# Altium PCB Tray 2 Fiddle.PcbDoc
Units mm, origin at the board's own origin, x right, y up, seen from the top; angles counter-clockwise.
Board outline 192 x 192 mm, 2 copper layers (L1, L6); 9 components, 666 nets, 180 pads, 0 vias.
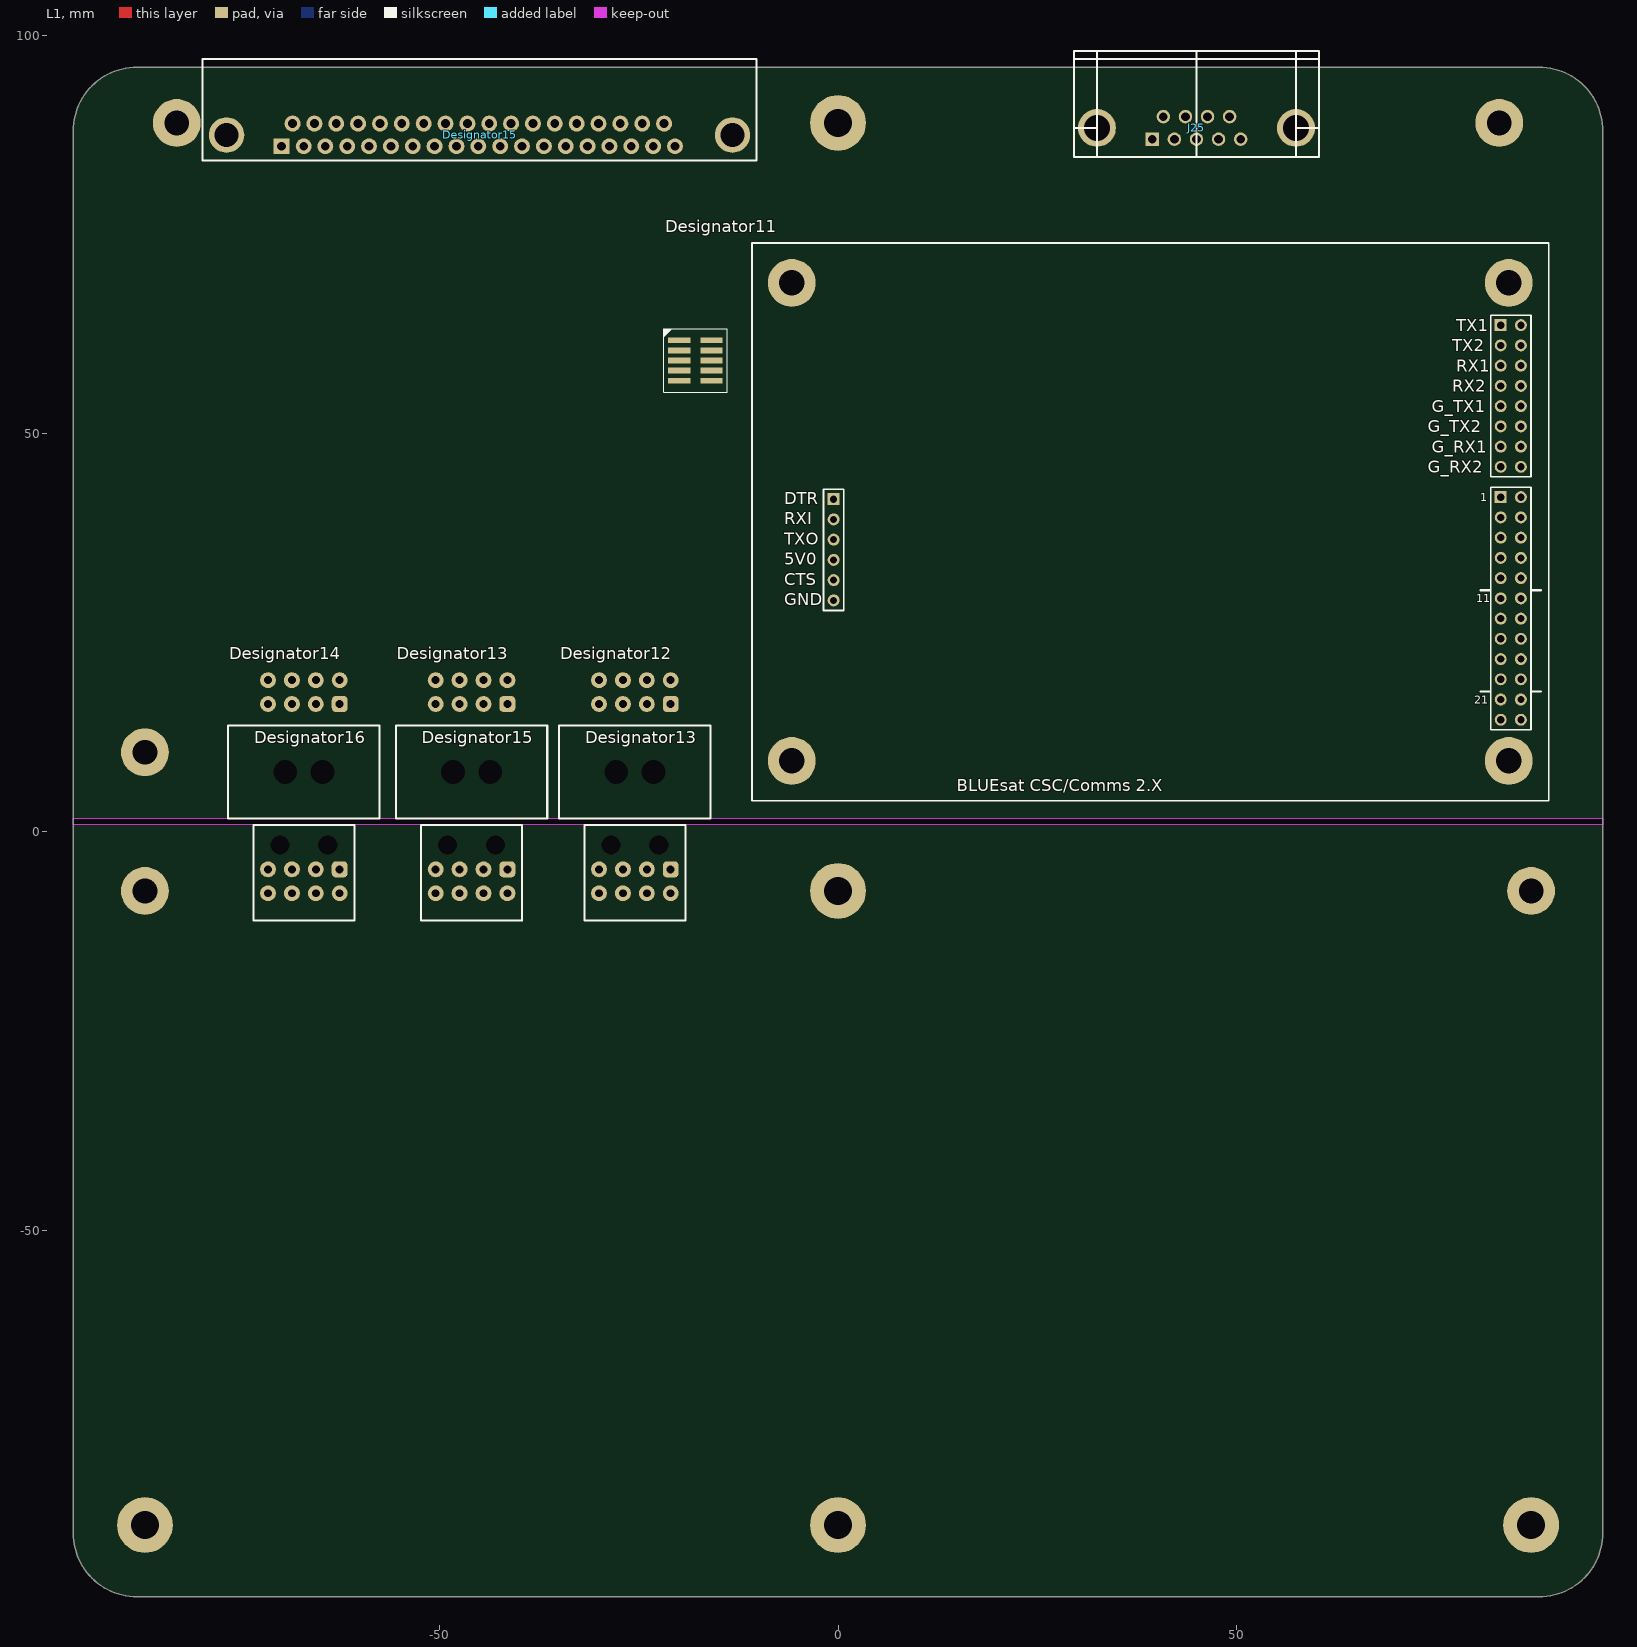
[diagram p0: L1 view]
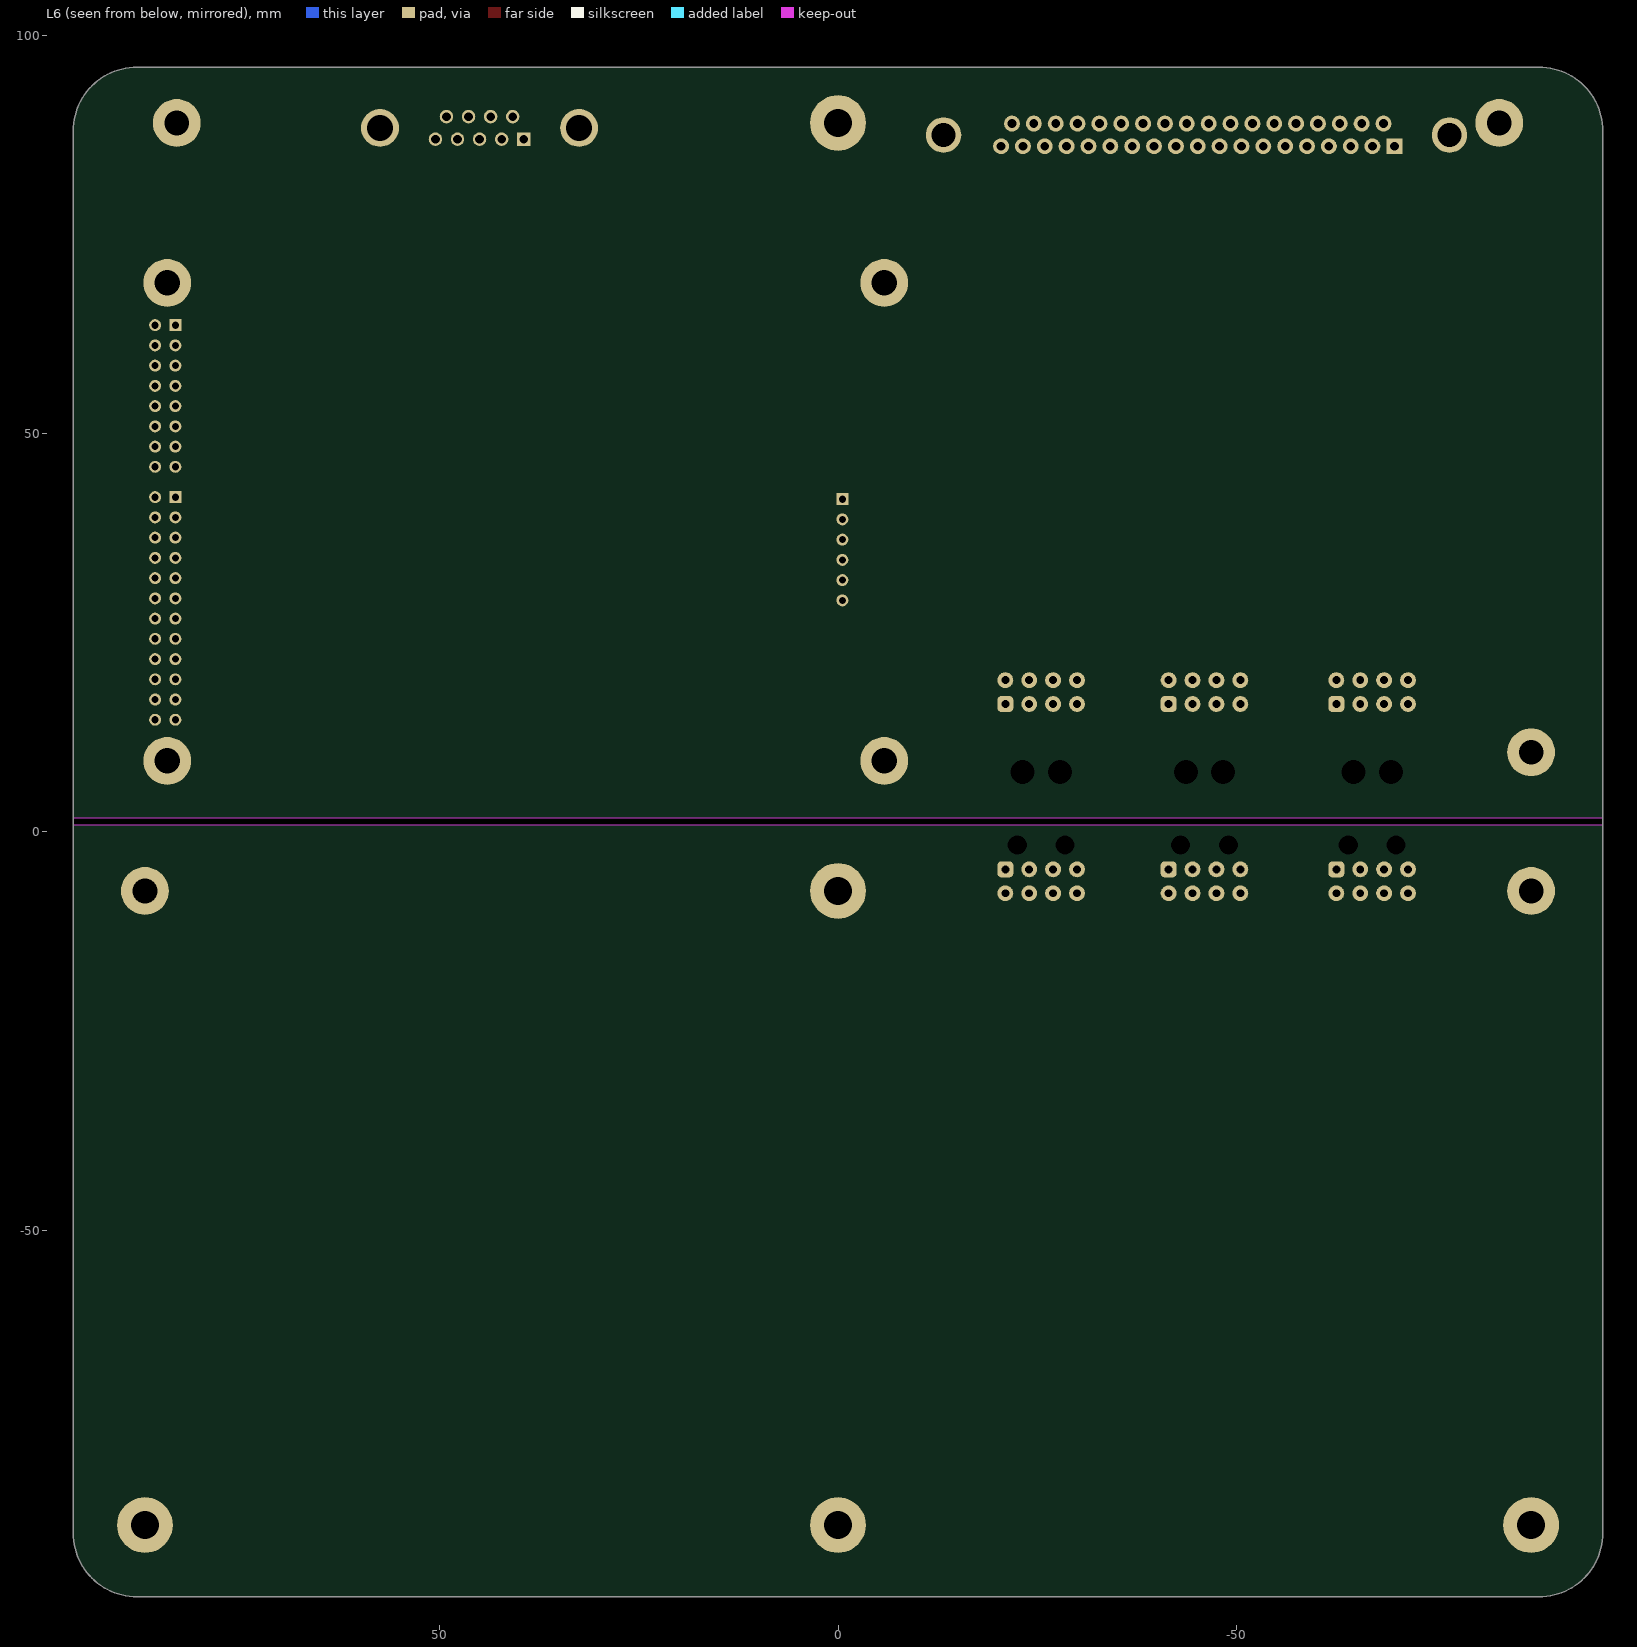
[diagram p1: L6 view, seen from below]

## Layer stack, top to bottom
L1: signal copper 0.0356
Dielectric: core 0.32, FR-4, Dk 4.8
L6: signal copper 0.0356

## Board outline
-96,-88 -96,88 cw(c-88,88) -88,96 88,96 cw(c88,88) 96,88 96,-88 cw(c88,-88) 88,-96 -88,-96 cw(c-88,-88)
cut-out: 96,1.7 96,0.9 -96,0.9 -96,1.7

## Design rules (kind name [scope] priority, off if disabled: settings)
Clearance [All] p1: gap=0.15
ComponentClearance [All] p1 off: gap=0.254 collisioncheckmode=3 verticalgap=0.254 showdistances=FALSE
FabricationTestPointUsage TestPointUsage [All] p1: valid=0 allowmultiple=FALSE
FabricationTestpoint Testpoint [All] p1: side=3 testpointundercomponent=TRUE minsize=1.016 maxsize=2.54 preferedsize=1.524 minholesize=0 maxholesize=1.016 preferedholesize=0.813 testpointgrid=0.025 allowsidetop=TRUE allowsidebottom=TRUE usegrid=TRUE gridtolerance=0
HoleSize [All] p1: absolutevalues=TRUE maxlimit=5 minlimit=0.025 maxpercent=80.000 minpercent=20.000
MinimumAnnularRing [All] p1: minimumring=0.15
PolygonConnect [All] p1: connectstyle=Relief reliefconductorwidth=0.254 reliefentries=4 polygonreliefangle="90 Angle" airgapwidth=0.254
RoutingVias [All] p1: holewidth=0.4 width=0.8 viastyle="Through Hole" minholewidth=0.4 minwidth=0.8 maxholewidth=4 maxwidth=5
SilkToSolderMaskClearance SilkscreenOverComponentPads [IsPad] p1: minsilkscreentomaskgap=0.254 clearancetoexposedcopper=TRUE
SolderMaskExpansion [All] p1: expansion=0.102
Width [All] p1: maxlimit=10 minlimit=0.15 preferedwidth=0.6 bottomlayer_prefwidth=0.2 minimp=50.000000 maximp=50.000000 favimp=50.000000
23 further rules are at their usual default settings.

## Classes and differential pairs
net class CODEC_I2C[0..1]: CODEC_I2C0 CODEC_I2C1
net class CODEC_I2S[0..3]: CODEC_I2S0 CODEC_I2S1 CODEC_I2S2 CODEC_I2S3
net class E\C\C\_\B\E\[0..3]: E\C\C\_\B\E\0 E\C\C\_\B\E\1 E\C\C\_\B\E\2 E\C\C\_\B\E\3
net class ECC_A[2..21]: ECC_A2 ECC_A3 ECC_A4 ECC_A5 ECC_A6 ECC_A7 ECC_A8 ECC_A9 ECC_A10 ECC_A11 ECC_A12 ECC_A13 ECC_A14 ECC_A15 ECC_A16 ECC_A17 ECC_A18 ECC_A19 ECC_A20 ECC_A21
net class ECC_D[0..31]: ECC_D0 ECC_D1 ECC_D2 ECC_D3 ECC_D4 ECC_D5 ECC_D6 ECC_D7 ECC_D8 ECC_D9 ECC_D10 ECC_D11 ECC_D12 ECC_D13 ECC_D14 ECC_D15 ECC_D16 ECC_D17 ECC_D18 ECC_D19 ECC_D20 ECC_D21 ECC_D22 ECC_D23 ECC_D24 ECC_D25 ECC_D26 ECC_D27 ECC_D28 ECC_D29 ECC_D30 ECC_D31
net class EXP[0..31]: EXP0 EXP1 EXP2 EXP3 EXP4 EXP5 EXP6 EXP7 EXP8 EXP9 EXP10 EXP11 EXP12 EXP13 EXP14 EXP15 EXP16 EXP17 EXP18 EXP19 EXP20 EXP21 EXP22 EXP23 EXP24 EXP25 EXP26 EXP27 EXP28 EXP29 EXP30 EXP31
net class F\L\A\S\H\_\C\S\[0..1]: F\L\A\S\H\_\C\S\0 F\L\A\S\H\_\C\S\1
net class F\P\G\A\_\C\S\[0..1]: F\P\G\A\_\C\S\0 F\P\G\A\_\C\S\1
net class GPS[0..11]: GPS0 GPS1 GPS2 GPS3 GPS4 GPS5 GPS6 GPS7 GPS8 GPS9 GPS10 GPS11
net class M\M\E\M\_\C\S\[0..3]: M\M\E\M\_\C\S\0 M\M\E\M\_\C\S\1 M\M\E\M\_\C\S\2 M\M\E\M\_\C\S\3
net class MDM_DEBUG[0..3]: MDM_DEBUG0 MDM_DEBUG1 MDM_DEBUG2 MDM_DEBUG3
net class P\R\_\B\E\[0..3]: P\R\_\B\E\0 P\R\_\B\E\1 P\R\_\B\E\2 P\R\_\B\E\3
net class PR_D[0..31]: PR_D0 PR_D1 PR_D2 PR_D3 PR_D4 PR_D5 PR_D6 PR_D7 PR_D8 PR_D9 PR_D10 PR_D11 PR_D12 PR_D13 PR_D14 PR_D15 PR_D16 PR_D17 PR_D18 PR_D19 PR_D20 PR_D21 PR_D22 PR_D23 PR_D24 PR_D25 PR_D26 PR_D27 PR_D28 PR_D29 PR_D30 PR_D31
net class PWR_I2C[0..1]: PWR_I2C0 PWR_I2C1
net class RS232_MODEM[0..3]: RS232_MODEM0 RS232_MODEM1 RS232_MODEM2 RS232_MODEM3
net class RS232_UMB[0..3]: RS232_UMB0 RS232_UMB1 RS232_UMB2 RS232_UMB3
net class S\A\_\C\A\S\[0..3]: S\A\_\C\A\S\0 S\A\_\C\A\S\1 S\A\_\C\A\S\2 S\A\_\C\A\S\3
net class S\A\_\C\S\[0..3]: S\A\_\C\S\0 S\A\_\C\S\1 S\A\_\C\S\2 S\A\_\C\S\3
net class SA_A[0..25]: SA_A0 SA_A1 SA_A2 SA_A3 SA_A4 SA_A5 SA_A6 SA_A7 SA_A8 SA_A9 SA_A10 SA_A11 SA_A12 SA_A13 SA_A14 SA_A15 SA_A16 SA_A17 SA_A18 SA_A19 SA_A20 SA_A21 SA_A22 SA_A23 SA_A24 SA_A25
net class SA_D[0..31]: SA_D0 SA_D1 SA_D2 SA_D3 SA_D4 SA_D5 SA_D6 SA_D7 SA_D8 SA_D9 SA_D10 SA_D11 SA_D12 SA_D13 SA_D14 SA_D15 SA_D16 SA_D17 SA_D18 SA_D19 SA_D20 SA_D21 SA_D22 SA_D23 SA_D24 SA_D25 SA_D26 SA_D27 SA_D28 SA_D29 SA_D30 SA_D31
net class SA_GP[0..27]: SA_GP0 SA_GP1 SA_GP2 SA_GP3 SA_GP4 SA_GP5 SA_GP6 SA_GP7 SA_GP8 SA_GP9 SA_GP10 SA_GP11 SA_GP12 SA_GP13 SA_GP14 SA_GP15 SA_GP16 SA_GP17 SA_GP18 SA_GP19 SA_GP20 SA_GP21 SA_GP22 SA_GP23 SA_GP24 SA_GP25 SA_GP26 SA_GP27
net class SA_LCD[0..7]: SA_LCD0 SA_LCD1 SA_LCD2 SA_LCD3 SA_LCD4 SA_LCD5 SA_LCD6 SA_LCD7
net class SA_SERIAL[0..3]: SA_SERIAL1 SA_SERIAL3
net class TLM1_I2C[0..1]: TLM1_I2C0 TLM1_I2C1
net class TLM2_I2C[0..1]: TLM2_I2C0 TLM2_I2C1
net class UMB[0..3]: UMB0 UMB1 UMB2 UMB3
component class ECCMemory-bank-1: C80 C81 IC12 IC13
component class MassMemory-bank-1: C144 C145 IC32 IC33
component class MassMemory-bank-2: C146 C147 IC34 IC35
component class MassMemory-bank-3: C148 C149 IC36 IC37
component class MassMemory-bank-4: C150 C151 IC38 IC39
component class ProtectedMemory-bank-1: C195 C196 IC46 IC47
component class Flash-bank-1: C98 C99 C100 C101 IC17 IC18 J16
component class Flash-bank-2: C104 C105 C106 C107 IC19 IC20 J17

## Components (designator, comment, footprint, x,y, rotation, side; value= is the part's Value field where it differs from the comment)
Designator11 "Comment" CSCFootprint 84.2,68.925 r0 top
Designator12 "Comment" "MOLEX 444280802" -25.5,7.55 r0 top
Designator13 "Comment" "MOLEX 447640802" -25.5,0.9 r180 top
Designator13 "Comment" "MOLEX 444280802" -46,7.55 r0 top
Designator14 "Comment" "MOLEX 444280802" -67.05,7.55 r0 top
Designator15 "Comment" "MOLEX 447640802" -46,0.9 r180 top
Designator15 "Comment" PCBComponent_1 -45,97 r0 top
Designator16 "Comment" "MOLEX 447640802" -67.05,0.9 r180 top
J25 "DE-9" DE-9 32.5,88.375 r0 top

## Footprints (in the part's own frame and the unit in brackets; to place one, negate y for a bottom-side part, rotate by r counter-clockwise, add the part's x,y. Pads: shape width x height; smd on the part's side, far side on the other; paste and mask are expansions set on the pad)
CSCFootprint [mm]
  rect 2.794x0.737 smd: A1(-104.132,-7.21) A2(-100.068,-7.21) A3(-104.132,-8.48) A4(-100.068,-8.48) A5(-104.132,-9.75) A6(-100.068,-9.75) A7(-104.132,-11.02) A8(-100.068,-11.02) A9(-104.132,-12.29) A10(-100.068,-12.29)
  rect 1.5x1.5 hole 0.9: B1(-84.75,-27.15) C1(-1.02,-5.31) D1(-1.02,-26.9)
  round 1.5 hole 0.9: B2(-84.75,-29.69) B3(-84.75,-32.23) B4(-84.75,-34.77) B5(-84.75,-37.31) B6(-84.75,-39.85) C2(1.52,-5.31) C3(-1.02,-7.85) C4(1.52,-7.85) C5(-1.02,-10.39) C6(1.52,-10.39) C7(-1.02,-12.93) C8(1.52,-12.93) C9(-1.02,-15.47) C10(1.52,-15.47) C11(-1.02,-18.01) C12(1.52,-18.01) C13(-1.02,-20.55) C14(1.52,-20.55) C15(-1.02,-23.09) C16(1.52,-23.09) D2(1.52,-26.9) D3(-1.02,-29.44) D4(1.52,-29.44) D5(-1.02,-31.98) D6(1.52,-31.98) D7(-1.02,-34.52) D8(1.52,-34.52) D9(-1.02,-37.06) D10(1.52,-37.06) D11(-1.02,-39.6) D12(1.52,-39.6) D13(-1.02,-42.14) D14(1.52,-42.14) D15(-1.02,-44.68) D16(1.52,-44.68) D17(-1.02,-47.22) D18(1.52,-47.22) D19(-1.02,-49.76) D20(1.52,-49.76) D21(-1.02,-52.3) D22(1.52,-52.3) D23(-1.02,-54.84) D24(1.52,-54.84)
  round 6 hole 3.2: E1(-90,0) E2(0,0) E3(0,-60) E4(-90,-60)
  silkscreen extent -106.1,-65 5,5, body extent -105.02,-12.92 -99.18,-6.57, height 5.96
DE-9 [mm]
  rect 1.69x1.69 hole 1.09: 1(6.955,-1.42)
  round 1.69 hole 1.09: 2(9.725,-1.42) 3(12.495,-1.42) 4(15.265,-1.42) 5(18.035,-1.42) 6(8.34,1.42) 7(11.11,1.42) 8(13.88,1.42) 9(16.65,1.42)
  round 4.76 hole 3.26: 10(0,0) 11(24.99,0)
  silkscreen extent -2.91,-3.66 27.9,9.63
"MOLEX 444280802" [mm] "B2B RA Header"
  rrect50% 2x2 hole 1: 1(4.5,8.509)
  round 2 hole 1: 2(4.5,11.506) 3(1.5,8.509) 4(1.5,11.506) 5(-1.5,8.509) 6(-1.5,11.506) 7(-4.5,8.509) 8(-4.5,11.506)
  round 0 hole 3 unplated: M1(-2.34,0) M2(2.34,0)
  silkscreen extent -9.5,-5.84 9.5,5.84, body extent -9.5,-5.84 9.5,12.87, height 11.95
"MOLEX 447640802" [mm] "B2B RA Receptacle"
  rrect50% 2x2 hole 1: 1(-4.5,5.59)
  round 2 hole 1: 2(-4.5,8.59) 3(-1.5,5.59) 4(-1.5,8.59) 5(1.5,5.59) 6(1.5,8.59) 7(4.5,5.59) 8(4.5,8.59)
  round 0 hole 2.4 unplated: M1(-3,2.54) M2(3,2.54)
  silkscreen extent -6.35,0 6.35,12.01, body extent -6.35,-8.98 6.35,12, height 10.53
PCBComponent_1 [mm]
  rect 2x2 / inner round 1.6 / far side rect 2x2 hole 1.1: 1(-24.841,-10.922)
  round 2 / inner round 1.6 / far side round 2 hole 1.1: 2(-22.073,-10.922) 3(-19.355,-10.922) 4(-16.612,-10.922) 5(-13.868,-10.922) 6(-11.125,-10.922) 7(-8.382,-10.922) 8(-5.639,-10.922) 9(-2.896,-10.922) 10(-0.152,-10.922) 11(2.591,-10.922) 12(5.334,-10.922) 13(8.077,-10.922) 14(10.82,-10.922) 15(13.564,-10.922) 16(16.307,-10.922) 17(19.05,-10.922) 18(21.793,-10.922) 19(24.536,-10.922) 20(-23.47,-8.077) 21(-20.726,-8.077) 22(-17.983,-8.077) 23(-15.24,-8.077) 24(-12.497,-8.077) 25(-9.754,-8.077) 26(-7.01,-8.077) 27(-4.267,-8.077) 28(-1.524,-8.077) 29(1.219,-8.077) 30(3.962,-8.077) 31(6.706,-8.077) 32(9.449,-8.077) 33(12.192,-8.077) 34(14.935,-8.077) 35(17.678,-8.077) 36(20.422,-8.077) 37(23.165,-8.077)
  round 4.445 hole 3.048: 38(-31.75,-9.525) 39(31.75,-9.525)
  silkscreen extent -34.77,-12.7 34.77,0, body extent -34.77,-12.7 34.77,6.23, height 12.55

## Free pads (board coordinates)
  round 6 hole 3.1: 0(-87,-7.4) 0(-87,10) 0(-83,89) 0(83,89) 0(87,-7.4)
  round 7 hole 3.5: 0(-87,-87) 0(0,-7.4) 0(0,-87) 0(0,89) 0(87,-87)

## Nets (pads, with @x,y where several pads share a name; then routed paths per layer and width w, separated by ;. In a path a pad name is that pad's centre, name@x,y a point inside that pad or via, vN(x,y) a via of type N, cw(c..) or ccw(c..) an arc to the next point about the centre after c; other vN are vias at no path point)
1V5: 
3V3A1: 
3V3A2: 
3V3A3: 
3V3A4: 
3V3CODEC: 
3V5GPS: 
5_EXP0: 
5_EXP1: 
5_EXP2: 
5_EXP3: 
5_EXP4: 
5_EXP5: 
5_EXP6: 
5_EXP7: 
5_EXP8: 
5_EXP9: 
5_EXP10: 
5_EXP11: 
5_EXP12: 
5_EXP13: 
5_EXP14: 
5_EXP15: 
5_EXP16: 
5_EXP17: 
5_EXP18: 
5_EXP19: 
5_EXP20: 
5_EXP21: 
5_EXP22: 
5_EXP23: 
5_EXP24: 
5_EXP25: 
5_EXP26: 
5_EXP27: 
5_EXP28: 
5_EXP29: 
5_EXP30: 
5_EXP31: 
5_PWR_I2C0: 
5_PWR_I2C1: 
5_RX_COS0: 
5_RX_COS1: 
5_TLM1_I2C0: 
5_TLM1_I2C1: 
5_TLM2_I2C0: 
5_TLM2_I2C1: 
5_TX_PTT0: 
5_TX_PTT1: 
5V: 
5VTLM: 
1200_10: 
1200_11: 
1200_12: 
1200_13: 
1200_14: 
1200_15: 
1200_16: 
1200_17: 
1200_20: 
1200_21: 
1200_22: 
1200_23: 
1200_24: 
1200_25: 
1200_26: 
1200_27: 
-5V: 
\S\A\_\R\E\S\E\T\: 
AVCC-CODEC: 
CLK_50MHZ: 
CLK_100MHZ: 
CLK_CODEC: 
CLK_USER: 
CLK_VAR: 
CODEC_I2C0: 
CODEC_I2C1: 
CODEC_I2S0: 
CODEC_I2S1: 
CODEC_I2S2: 
CODEC_I2S3: 
CODEC_QMUTE: 
CODEC_STATUS: 
DVCC-CODEC: 
E\C\C\_\B\E\0: 
E\C\C\_\B\E\1: 
E\C\C\_\B\E\2: 
E\C\C\_\B\E\3: 
E\C\C\_\C\S\0: 
E\C\C\_\O\E\: 
E\C\C\_\W\E\: 
ECC_A2: 
ECC_A3: 
ECC_A4: 
ECC_A5: 
ECC_A6: 
ECC_A7: 
ECC_A8: 
ECC_A9: 
ECC_A10: 
ECC_A11: 
ECC_A12: 
ECC_A13: 
ECC_A14: 
ECC_A15: 
ECC_A16: 
ECC_A17: 
ECC_A18: 
ECC_A19: 
ECC_A20: 
ECC_A21: 
ECC_D0: 
ECC_D1: 
ECC_D2: 
ECC_D3: 
ECC_D4: 
ECC_D5: 
ECC_D6: 
ECC_D7: 
ECC_D8: 
ECC_D9: 
ECC_D10: 
ECC_D11: 
ECC_D12: 
ECC_D13: 
ECC_D14: 
ECC_D15: 
ECC_D16: 
ECC_D17: 
ECC_D18: 
ECC_D19: 
ECC_D20: 
ECC_D21: 
ECC_D22: 
ECC_D23: 
ECC_D24: 
ECC_D25: 
ECC_D26: 
ECC_D27: 
ECC_D28: 
ECC_D29: 
ECC_D30: 
ECC_D31: 
EXP0: 
EXP1: 
EXP2: 
EXP3: 
EXP4: 
EXP5: 
EXP6: 
EXP7: 
EXP8: 
EXP9: 
EXP10: 
EXP11: 
EXP12: 
EXP13: 
EXP14: 
EXP15: 
EXP16: 
EXP17: 
EXP18: 
EXP19: 
EXP20: 
EXP21: 
EXP22: 
EXP23: 
EXP24: 
EXP25: 
EXP26: 
EXP27: 
EXP28: 
EXP29: 
EXP30: 
EXP31: 
F\L\A\S\H\_\C\S\0: 
F\L\A\S\H\_\C\S\1: 
F\P\G\A\_\C\S\0: 
F\P\G\A\_\C\S\1: 
GND: 
GPS0: 
GPS1: 
GPS2: 
GPS3: 
GPS4: 
GPS5: 
GPS6: 
GPS7: 
GPS8: 
GPS9: 
GPS10: 
GPS11: 
M\M\E\M\_\C\S\0: 
M\M\E\M\_\C\S\1: 
M\M\E\M\_\C\S\2: 
M\M\E\M\_\C\S\3: 
MDM_DEBUG0: 
MDM_DEBUG1: 
MDM_DEBUG2: 
MDM_DEBUG3: 
NetC2_2: 
NetC3_1: 
NetC4_1: 
NetC5_1: 
NetC5_2: 
NetC6_1: 
NetC7_1: 
NetC7_2: 
NetC8_2: 
NetC10_2: 
NetC11_1: 
NetC12_1: 
NetC13_1: 
NetC13_2: 
NetC14_1: 
NetC15_1: 
NetC15_2: 
NetC16_2: 
NetC17_1: 
NetC18_1: 
NetC20_1: 
NetC20_2: 
NetC21_1: 
NetC21_2: 
NetC22_1: 
NetC23_2: 
NetC24_2: 
NetC25_2: 
NetC26_2: 
NetC27_1: 
NetC27_2: 
NetC28_1: 
NetC29_1: 
NetC29_2: 
NetC30_1: 
NetC31_2: 
NetC33_2: 
NetC34_1: 
NetC35_1: 
NetC37_1: 
NetC37_2: 
NetC38_1: 
NetC38_2: 
NetC39_1: 
NetC40_2: 
NetC41_2: 
NetC42_2: 
NetC43_2: 
NetC44_1: 
NetC44_2: 
NetC45_1: 
NetC46_1: 
NetC46_2: 
NetC47_1: 
NetC48_2: 
NetC50_2: 
NetC51_2: 
NetC52_1: 
NetC53_1: 
NetC54_2: 
NetC59_1: 
NetC60_1: 
NetC61_1: 
NetC66_2: 
NetC67_2: 
NetC68_1: 
NetC70_1: 
NetC70_2: 
NetC71_1: 
NetC71_2: 
NetC72_1: 
NetC73_1: 
NetC117_1: 
NetC117_2: 
NetC118_1: 
NetC119_2: 
NetC120_1: 
NetC120_2: 
NetC124_1: 
NetC124_2: 
NetC125_1: 
NetC126_2: 
NetC127_1: 
NetC127_2: 
NetC134_1: 
NetC134_2: 
NetC135_1: 
NetC135_2: 
NetC142_1: 
NetC142_2: 
NetC143_1: 
NetC143_2: 
NetC166_1: 
NetC167_1: 
NetC167_2: 
NetC168_1: 
NetC169_1: 
NetC169_2: 
NetC176_1: 
NetC176_2: 
NetC177_1: 
NetC177_2: 
NetC180_2: 
NetC181_2: 
NetC182_1: 
NetC183_1: 
NetC183_2: 
NetC188_1: 
NetC188_2: 
NetC190_2: 
NetC193_2: 
NetC236_1: 
NetC237_2: 
NetC238_1: 
NetC241_2: 
NetD12_2: 
NetIC1_7: 
NetIC2_7: 
NetIC3_1: 
NetIC3_8: 
NetIC3_9: 
NetIC4_15: 
NetIC4_16: 
NetIC4_20: 
NetIC5_1: 
NetIC5_8: 
NetIC5_9: 
NetIC6_15: 
NetIC6_16: 
NetIC6_20: 
NetIC7_4: 
NetIC7_7: 
NetIC7_10: 
NetIC7_14: 
NetIC7_15: 
NetIC9_3: 
NetIC9_5: 
NetIC9_13: 
NetIC16_54: 
NetIC16_81: 
NetIC16_82: 
NetIC16_84: 
NetIC16_86: 
NetIC16_90: 
NetIC16_91: 
NetIC16_92: 
NetIC16_93: 
NetIC16_94: 
NetIC16_96: 
NetIC16_98: 
NetIC16_99: 
NetIC16_100: 
NetIC16_101: 
NetIC16_102: 
NetIC16_103: 
NetIC16_104: 
NetIC16_105: 
NetIC16_106: 
NetIC16_107: 
NetIC16_108: 
NetIC16_109: 
NetIC16_157: 
NetIC16_202: 
NetIC16_203: 
NetIC16_204: 
NetIC16_205: 
NetIC16_206: 
NetIC16_207: 
NetIC16_208: 
NetIC17_14: 
NetIC19_14: 
NetIC21_11: 
NetIC23_11: 
NetIC24_11: 
NetIC25_11: 
NetIC26_11: 
NetIC27_11: 
NetIC40_54: 
NetIC40_103: 
NetIC40_104: 
NetIC40_157: 
NetIC40_207: 
NetIC41_9: 
NetIC41_11: 
NetIC42_9: 
NetIC42_11: 
NetIC43_9: 
NetIC43_11: 
NetIC44_3: 
NetIC44_8: 
NetIC50_3: 
NetIC50_4: 
NetIC50_5: 
NetIC50_6: 
NetIC50_7: 
NetIC50_8: 
NetIC50_9: 
NetIC50_10: 
NetIC50_11: 
NetIC50_14: 
NetIC50_15: 
NetIC50_16: 
NetIC50_17: 
NetIC50_18: 
NetIC50_19: 
NetIC50_20: 
NetIC50_21: 
NetIC50_22: 
NetIC50_24: 
NetIC50_25: 
NetIC50_26: 
NetIC50_27: 
NetIC50_28: 
NetIC50_29: 
NetIC50_30: 
NetIC50_31: 
NetIC50_32: 
NetIC50_35: 
NetIC50_36: 
NetIC50_37: 
NetIC50_38: 
NetIC50_39: 
NetIC50_40: 
NetIC50_41: 
NetIC52_1: 
NetIC54_4: 
NetIC54_5: 
NetIC55_15: 
NetIC55_16: 
NetIC55_20: 
NetIC55_21: 
NetIC55_23: 
NetIC56_4: 
NetIC56_10: 
NetIC57_117: 
NetIC57_118: 
NetIC57_137: 
NetIC57_138: 
NetIC57_139: 
NetIC57_140: 
NetIC57_143: 
NetIC57_144: 
NetIC57_145: 
NetIC57_146: 
NetIC57_147: 
NetIC57_148: 
NetIC57_149: 
NetIC57_150: 
NetIC57_155: 
NetIC57_156: 
NetIC57_157: 
NetIC57_158: 
NetIC57_159: 
NetIC57_160: 
NetIC57_163: 
NetIC57_164: 
NetIC57_165: 
NetIC57_166: 
NetIC57_167: 
NetIC57_168: 
NetIC57_169: 
NetIC57_170: 
NetIC57_184: 
NetIC57_185: 
NetIC57_186: 
NetIC57_187: 
NetIC57_194: 
NetIC57_197: 
NetIC57_198: 
NetIC57_199: 
NetIC57_200: 
NetIC57_201: 
NetJ2_1: 
NetJ4_2: 
NetJ6_1: 
NetJ8_1: 
NetJ10_2: 
NetJ12_1: 
NetP1_2: 
NetP2_2: 
NetP3_2: 
NetP4_2: 
NetR132_1: 
NetR133_1: 
P\R\_\B\E\0: 
P\R\_\B\E\1: 
P\R\_\B\E\2: 
P\R\_\B\E\3: 
P\R\_\C\S\0: 
P\R\_\O\E\: 
P\R\_\W\E\: 
PR_D0: 
PR_D1: 
PR_D2: 
PR_D3: 
PR_D4: 
PR_D5: 
PR_D6: 
PR_D7: 
PR_D8: 
PR_D9: 
PR_D10: 
PR_D11: 
PR_D12: 
PR_D13: 
PR_D14: 
PR_D15: 
PR_D16: 
PR_D17: 
PR_D18: 
PR_D19: 
PR_D20: 
PR_D21: 
PR_D22: 
PR_D23: 
PR_D24: 
PR_D25: 
PR_D26: 
PR_D27: 
PR_D28: 
PR_D29: 
PR_D30: 
PR_D31: 
PWR_I2C0: 
PWR_I2C1: 
R\O\M\_\C\S\: 
RS232_MODEM0: 
RS232_MODEM1: 
RS232_MODEM2: 
RS232_MODEM3: 
RS232_UMB0: 
RS232_UMB1: 
RS232_UMB2: 
RS232_UMB3: 
RX1: 
RX1COS7V: 
RX2: 
RX2COS7V: 
S\A\_\C\A\S\0: 
S\A\_\C\A\S\1: 
S\A\_\C\A\S\2: 
S\A\_\C\A\S\3: 
S\A\_\C\S\0: 
S\A\_\C\S\1: 
S\A\_\C\S\2: 
S\A\_\C\S\3: 
S\A\_\O\E\: 
S\A\_\W\E\: 
SA_A0: 
SA_A1: 
SA_A2: 
SA_A3: 
SA_A4: 
SA_A5: 
SA_A6: 
SA_A7: 
SA_A8: 
SA_A9: 
SA_A10: 
SA_A11: 
SA_A12: 
SA_A13: 
SA_A14: 
SA_A15: 
SA_A16: 
SA_A17: 
SA_A18: 
SA_A19: 
SA_A20: 
SA_A21: 
SA_A22: 
SA_A23: 
SA_A24: 
SA_A25: 
SA_BATTFAULT: 
SA_D0: 
SA_D1: 
SA_D2: 
SA_D3: 
SA_D4: 
SA_D5: 
SA_D6: 
SA_D7: 
SA_D8: 
SA_D9: 
SA_D10: 
SA_D11: 
SA_D12: 
SA_D13: 
SA_D14: 
SA_D15: 
SA_D16: 
SA_D17: 
SA_D18: 
SA_D19: 
SA_D20: 
SA_D21: 
SA_D22: 
SA_D23: 
SA_D24: 
SA_D25: 
SA_D26: 
SA_D27: 
SA_D28: 
SA_D29: 
SA_D30: 
SA_D31: 
SA_GP0: 
SA_GP1: 
SA_GP2: 
SA_GP3: 
SA_GP4: 
SA_GP5: 
SA_GP6: 
SA_GP7: 
SA_GP8: 
SA_GP9: 
SA_GP10: 
SA_GP11: 
SA_GP12: 
SA_GP13: 
SA_GP14: 
SA_GP15: 
SA_GP16: 
SA_GP17: 
SA_GP18: 
SA_GP19: 
SA_GP20: 
SA_GP21: 
SA_GP22: 
SA_GP23: 
SA_GP24: 
SA_GP25: 
SA_GP26: 
SA_GP27: 
SA_LCD0: 
SA_LCD1: 
SA_LCD2: 
SA_LCD3: 
SA_LCD4: 
SA_LCD5: 
SA_LCD6: 
SA_LCD7: 
SA_PWREN: 
SA_SERIAL1: 
SA_SERIAL3: 
SEPA: 
TLM1_I2C0: 
TLM1_I2C1: 
TLM2_I2C0: 
TLM2_I2C1: 
TLMVCC: 
TX1_1200: 
TX1_9600: 
TX1_CODEC: 
TX1PTT: 
TX2_1200: 
TX2_9600: 
TX2_CODEC: 
TX2PTT: 
UMB0: 
UMB1: 
UMB2: 
UMB3: 
UMBB: 
W\D\O\G\2\_\R\E\S\E\T\: 
pads on no net: Designator11.A1 Designator11.A2 Designator11.A3 Designator11.A4 Designator11.A5 Designator11.A6 Designator11.A7 Designator11.A8 Designator11.A9 Designator11.A10 Designator11.B1 Designator11.B2 Designator11.B3 Designator11.B4 Designator11.B5 Designator11.B6 Designator11.C1 Designator11.C2 Designator11.C3 Designator11.C4 Designator11.C5 Designator11.C6 Designator11.C7 Designator11.C8 Designator11.C9 Designator11.C10 Designator11.C11 Designator11.C12 Designator11.C13 Designator11.C14 Designator11.C15 Designator11.C16 Designator11.D1 Designator11.D2 Designator11.D3 Designator11.D4 Designator11.D5 Designator11.D6 Designator11.D7 Designator11.D8 Designator11.D9 Designator11.D10 Designator11.D11 Designator11.D12 Designator11.D13 Designator11.D14 Designator11.D15 Designator11.D16 Designator11.D17 Designator11.D18 Designator11.D19 Designator11.D20 Designator11.D21 Designator11.D22 Designator11.D23 Designator11.D24 Designator11.E1 Designator11.E2 Designator11.E3 Designator11.E4 Designator12.1 Designator12.2 Designator12.3 Designator12.4 Designator12.5 Designator12.6 Designator12.7 Designator12.8 Designator12.M1 Designator12.M2 Designator13.1 Designator13.2 Designator13.3 Designator13.4 Designator13.5 Designator13.6 Designator13.7 Designator13.8 Designator13.M1 Designator13.M2 Designator14.1 Designator14.2 Designator14.3 Designator14.4 Designator14.5 Designator14.6 Designator14.7 Designator14.8 Designator14.M1 Designator14.M2 Designator15.1 Designator15.2 Designator15.3 Designator15.4 Designator15.5 Designator15.6 Designator15.7 Designator15.8 Designator15.9 Designator15.10 Designator15.11 Designator15.12 Designator15.13 Designator15.14 Designator15.15 Designator15.16 Designator15.17 Designator15.18 Designator15.19 Designator15.20 Designator15.21 Designator15.22 Designator15.23 Designator15.24 Designator15.25 Designator15.26 Designator15.27 Designator15.28 Designator15.29 Designator15.30 Designator15.31 Designator15.32 Designator15.33 Designator15.34 Designator15.35 Designator15.36 Designator15.37 Designator15.38 Designator15.39 Designator15.M1 Designator15.M2 Designator16.1 Designator16.2 Designator16.3 Designator16.4 Designator16.5 Designator16.6 Designator16.7 Designator16.8 Designator16.M1 Designator16.M2 J25.1 J25.2 J25.3 J25.4 J25.5 J25.6 J25.7 J25.8 J25.9 J25.10 J25.11

## Silkscreen, mask and mechanical layers (free items; w line width, h text height)
Mechanical 1:
  lines w0.254: -98,-88 ccw(c-88,-88) -88,-98 88,-98 ccw(c88,-88) 98,-88 98,88 ccw(c88,88) 88,98 -88,98 ccw(c-88,88) -98,88 -98,-88 ; -96,-88 ccw(c-88,-88) -88,-96 88,-96 ccw(c88,-88) 96,-88 96,88 ccw(c88,88) 88,96 -88,96 ccw(c-88,88) -96,88 -96,-88
Mechanical 5:
  lines w0.025: 96,87.9 96,1.7 -96,1.7 -96,88 ; 96,88 ccw(c88,88) 88,96 -88,96 ccw(c-88,88) -96,88 ; -96,88 -96,88 ; -88,-96 cw(c-88,-88) -96,-88 -96,0.9 96,0.9 96,-88 cw(c88,-88) 88,-96 -88,-96 ; -88,-96 -88,-96

## Text inside footprints (layer, text, board x,y; h text height)
Designator11: Top Overlay "TX1" at 77.592,62.853 h1.52; Top Overlay "TX2" at 77.084,60.313 h1.52; Top Overlay "RX1" at 77.592,57.773 h1.52; Top Overlay "RX2" at 77.084,55.233 h1.52; Top Overlay "G_TX1" at 74.544,52.693 h1.52; Top Overlay "G_TX2" at 74.036,50.153 h1.52; Top Overlay "G_RX1" at 74.544,47.613 h1.52; Top Overlay "G_RX2" at 74.036,45.073 h1.52; Top Overlay "1" at 80.64,41.517 h1.02; Top Overlay "11" at 80.132,28.817 h1.02; Top Overlay "21" at 79.878,16.117 h1.02; Top Overlay "BLUEsat CSC/Comms 2.X" at 14.9,5.1 h1.52; Top Overlay "5V0" at -6.765,33.52 h1.52; Top Overlay "CTS" at -6.765,30.98 h1.52; Top Overlay "GND" at -6.765,28.44 h1.52; Top Overlay "DTR" at -6.765,41.14 h1.52; Top Overlay "RXI" at -6.765,38.6 h1.52; Top Overlay "TXO" at -6.765,36.06 h1.52
Designator12: Mechanical 15 "EDGE OF BOARD" at -28.294,0.946 h0.5
Designator13: Mechanical 15 "EDGE OF BOARD" at -22.5,1.7 h0.5 r180
Designator13: Mechanical 15 "EDGE OF BOARD" at -48.794,0.946 h0.5
Designator14: Mechanical 15 "EDGE OF BOARD" at -69.844,0.946 h0.5
Designator15: Mechanical 15 "EDGE OF BOARD" at -43,1.7 h0.5 r180
Designator16: Mechanical 15 "EDGE OF BOARD" at -64.05,1.7 h0.5 r180